# Altium PCB io_expansion.PcbDoc
Units mil, origin at the board's own origin, x right, y up, seen from the top; angles counter-clockwise.
Board outline 1000 x 1020 mil, 4 copper layers (Top Layer, GND, Signal Layer 2, Bottom Layer), stack 30.634 mil thick; 24 components, 32 nets, 127 pads, 43 vias.
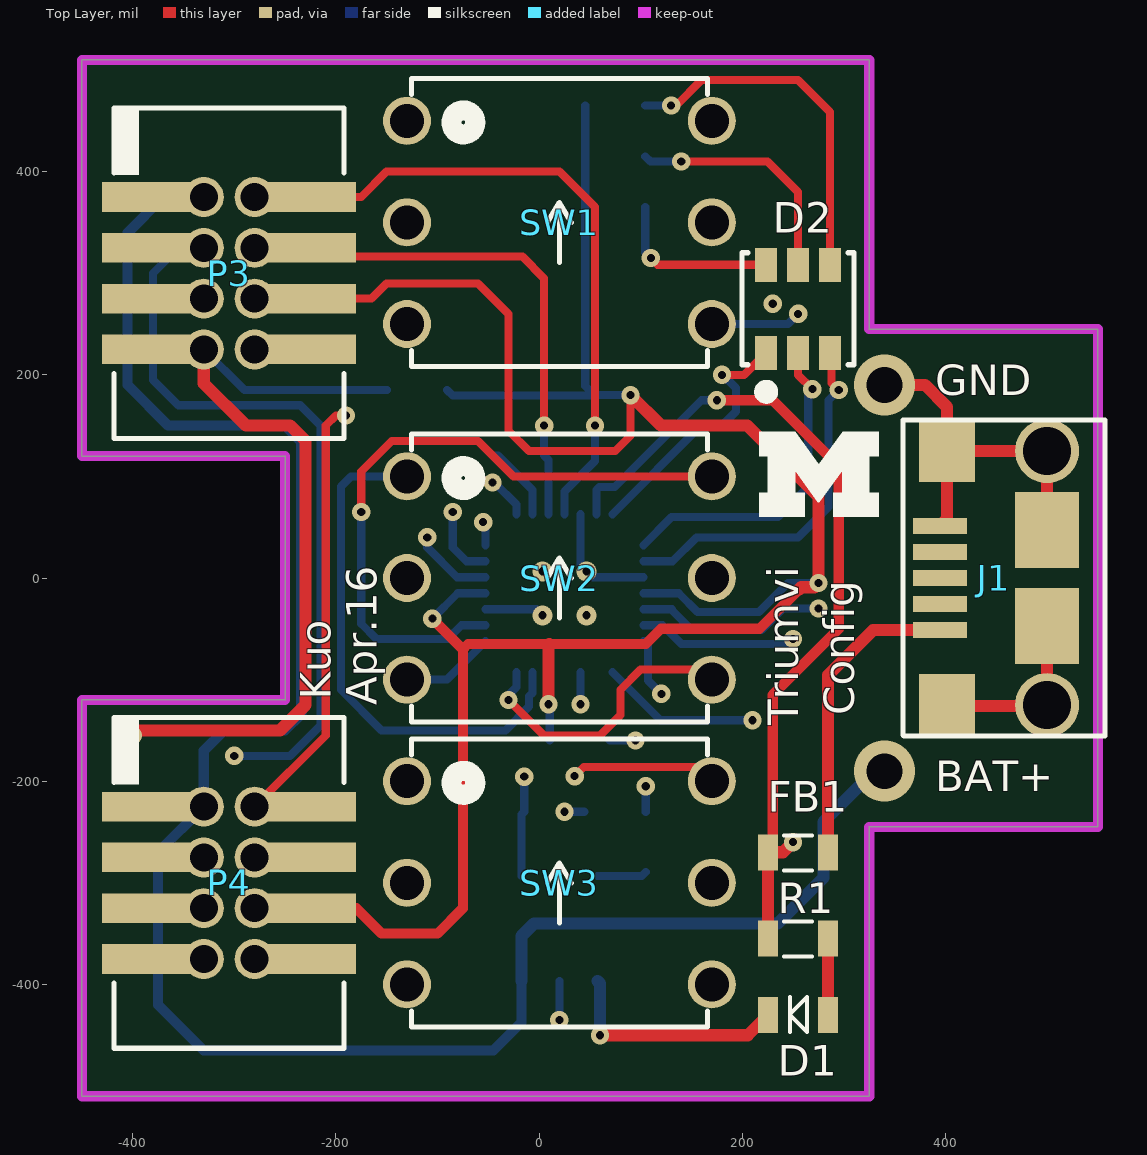
[diagram p0: Top Layer view]
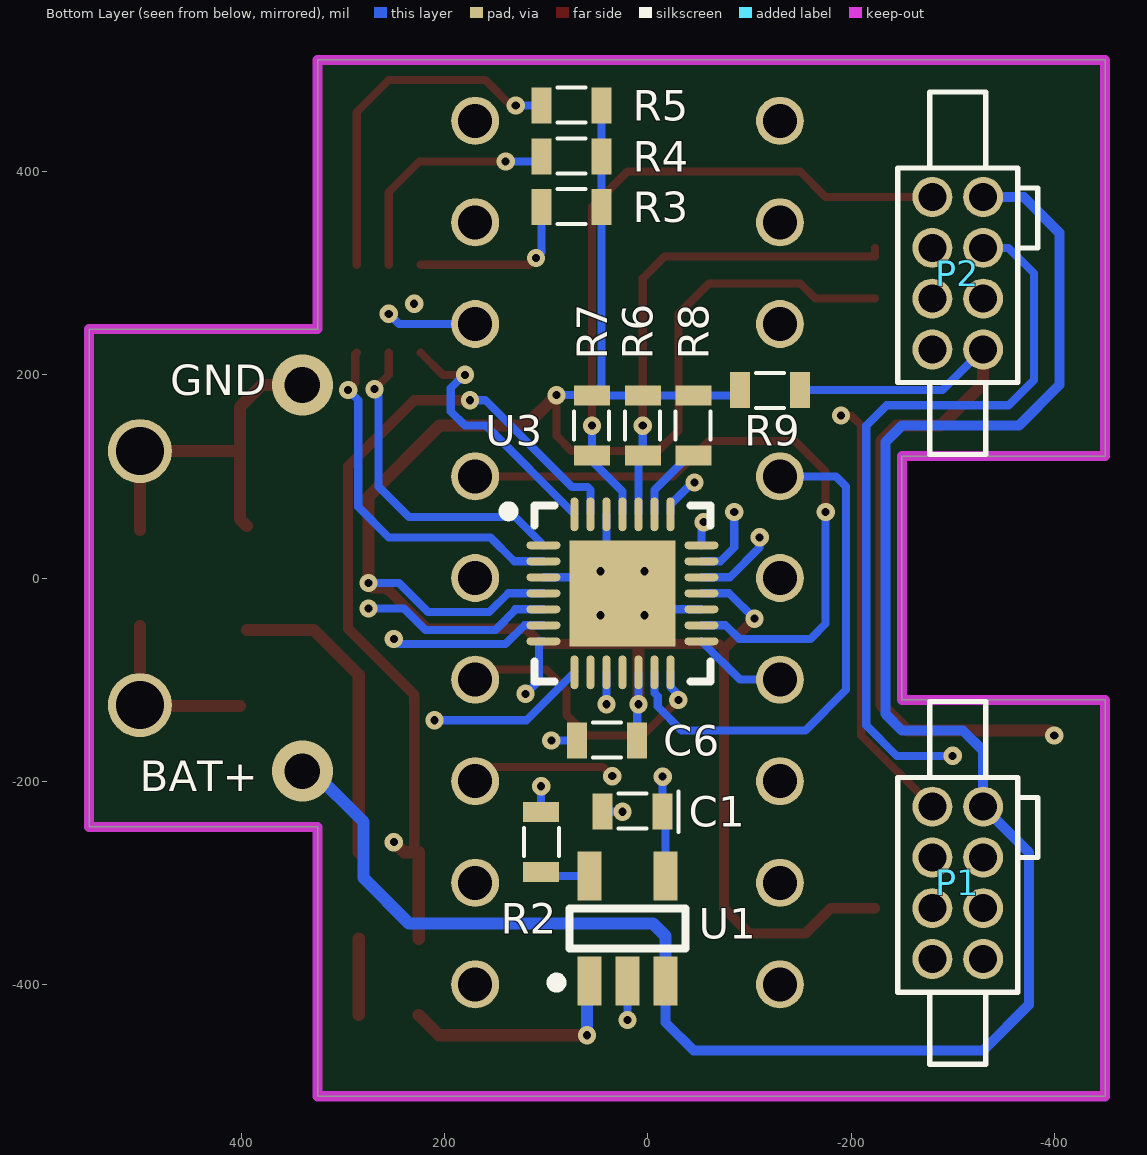
[diagram p1: Bottom Layer view, seen from below]
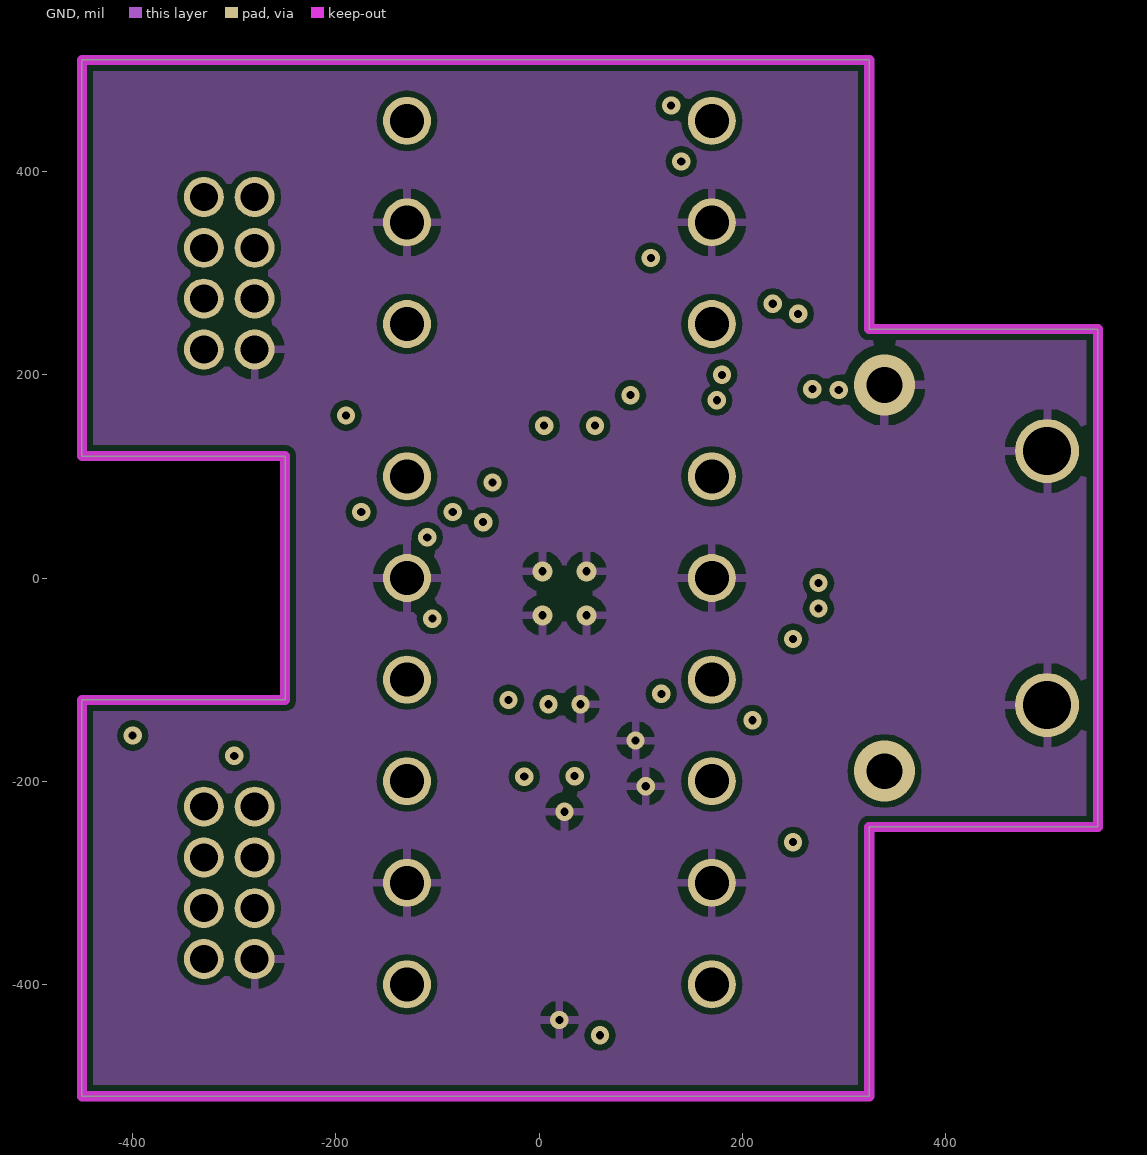
[diagram p2: GND]
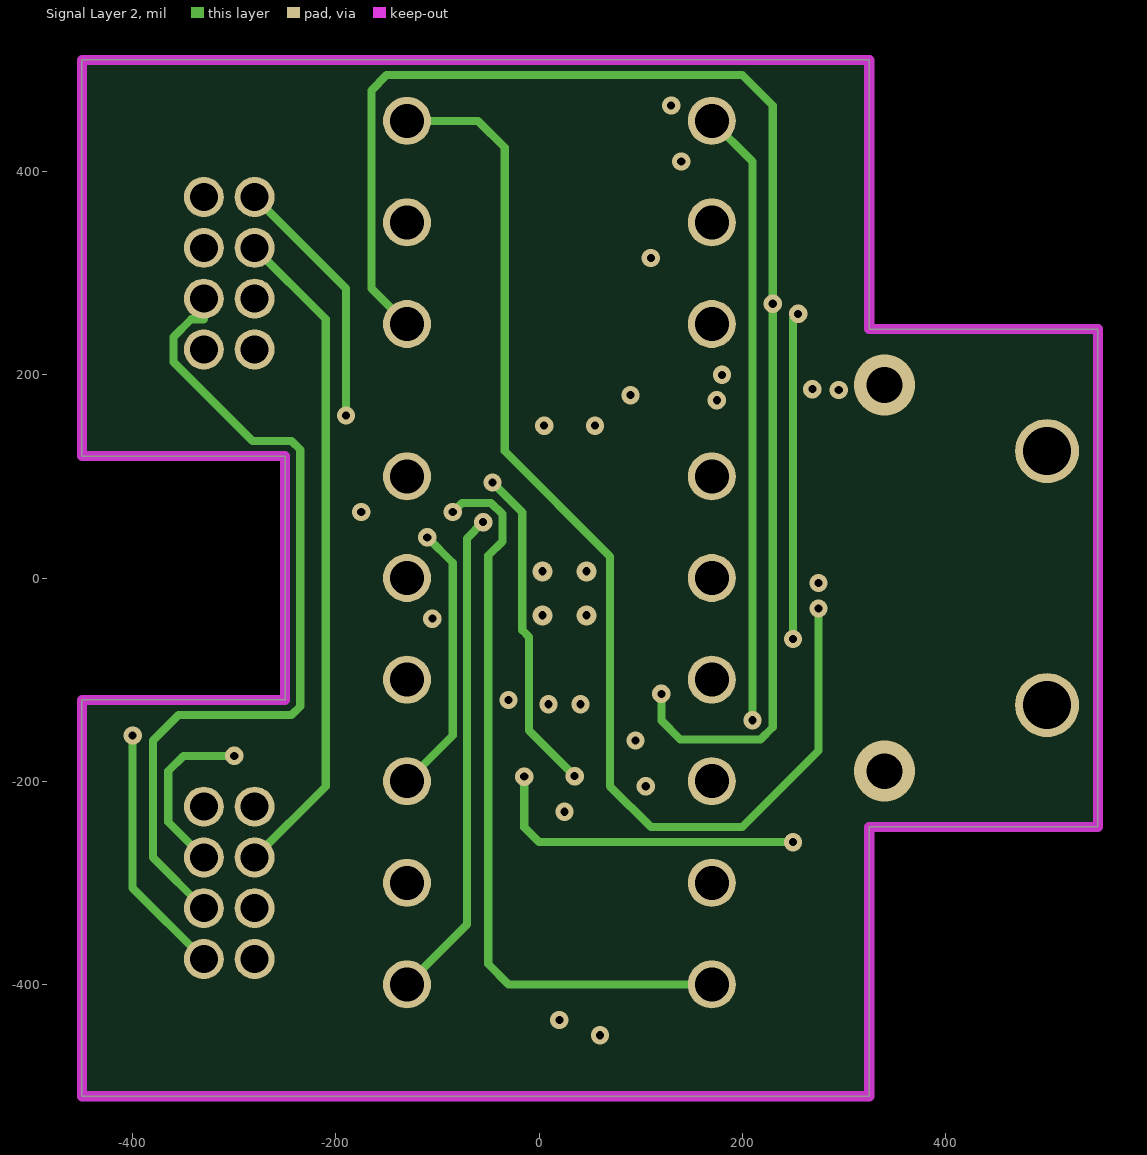
[diagram p3: Signal Layer 2]

## Layer stack, top to bottom
Top Solder: solder mask 0.4, Solder Resist, Dk 3.5
Top Layer: signal copper 1.4
Dielectric 1: core 10, FR-4, Dk 4.2
GND: signal copper 1.417
Dielectric 3: prepreg 5, Dk 4.2
Signal Layer 2: signal copper 1.417
Dielectric 2: core 10, Dk 4.2
Bottom Layer: signal copper 1.4
Bottom Solder: solder mask 0.4, Solder Resist, Dk 3.5

## Board outline
-450,-510 -450,-120 -250,-120 -250,120 -450,120 -450,510 325,510 325,245 550,245 550,-245 325,-245 325,-510

## Design rules (kind name [scope] priority, off if disabled: settings)
Clearance "non plated holes" [InPadClass('NPHOLES')] p1: gap=10 // Sunstone Circuits Minimum Clearance Rule (MLB~4&6 Layer Designs)
Clearance "Clearance~Sunstone Circuits" [All] p2: gap=6 // Sunstone Circuits Minimum Clearance Rule (MLB~4&6 Layer Designs)
DiffPairsRouting [All] p1: maxlimit=10 minlimit=10 mostfreqgap=10 toplayer_minwidth=6 toplayer_maxwidth=15 toplayer_prefwidth=15 midlayer1_minwidth=6 midlayer1_maxwidth=15 midlayer1_prefwidth=15 midlayer2_minwidth=6 midlayer2_maxwidth=15 midlayer2_prefwidth=15 bottomlayer_minwidth=6 bottomlayer_maxwidth=15 bottomlayer_prefwidth=15 maxuncoupledlength=500
HoleSize "HoleSize~Sunstone Circuits" [All] p1: absolutevalues=TRUE maxlimit=251 minlimit=8 maxpercent=80.000 minpercent=20.000 // Sunstone Circuits Hole Size Rule (MLB~4&6 Layer Designs)
HoleSize Testpoint [All] p2: absolutevalues=TRUE maxlimit=100 minlimit=1 maxpercent=80.000 minpercent=20.000
HoleSize TestPointUsage [All] p3: absolutevalues=TRUE maxlimit=100 minlimit=1 maxpercent=80.000 minpercent=20.000
MinimumAnnularRing "MinimumAnnularRing~Sunstone Circuits" [All] p1 off: minimumring=7 // Sunstone Circuits Minimum Annular Ring (MLB~4&6 Layer Designs)
MinimumSolderMaskSliver [All] p1 off: minsoldermaskwidth=10
PlaneClearance "PlaneClearance~Sunstone Circuits" [All] p1: clearance=12 // Sunstone Circuits Power Plane Clearance Rule (MLB~4&6 Layer Designs)
PlaneConnect "PlaneConnect~Sunstone Circuits" [All] p1: planeconnectstyle=Relief reliefexpansion=10 reliefentries=4 reliefconductorwidth=8 reliefairgap=10 // Sunstone Circuits Power Plane Connect Rule (MLB~4&6 Layer Designs)
PolygonConnect "PolygonConnect~Sunstone Circuits" [All] p1: connectstyle=Relief reliefconductorwidth=8 reliefentries=4 polygonreliefangle="90 Angle" airgapwidth=10 // Sunstone Circuits Polygon Connect Style (MLB~4&6 Layer Designs)
RoomDefinition io_expansion [InComponentClass('io_expansion')] p1 off: confinementstyle=ConfineIn formatcopy=TRUE lockcomponents=FALSE outline -443,-475.3 -443,475.3 -400,475.3 -400,491.04 -166.62,491.04 -166.62,504.24 206.62,504.24 206.62,341.93 322.62,341.93 322.62,171.42 610,171.42 610,-171.42 311.26,-171.42 311.26,-464.61 -167,-464.61 -167,-475.3 -233.44,-475.3 -233.44,-491.04 -400,-491.04 -400,-475.3
RoutingVias "RoutingVias~Sunstone Circuits" [All] p1: holewidth=16 width=30 viastyle="Through Hole" minholewidth=6 minwidth=18 maxholewidth=20 maxwidth=40 // Sunstone Circuits Routing Vias Rule (MLB~4&6 Layer Designs)
ShortCircuit "ShortCircuit~Sunstone Circuits" [All] p1: allowed=FALSE // Sunstone Circuits Short Circuit Rule~Do Not Allow (MLB~4&6 Layer Designs)
SilkToSilkClearance [All] p1 off: silktosilkclearance=10
SilkToSolderMaskClearance [IsPad] p1 off: minsilkscreentomaskgap=10 clearancetoexposedcopper=TRUE
SolderMaskExpansion TentVias [isVia] p1: expansion=-20 // Sunstone Circuits Solder Mask Expansion Rule (MLB~4&6 Layer Designs)
SolderMaskExpansion "SolderMaskExpansion~Sunstone Circuits" [All] p2: expansion=3 // Sunstone Circuits Solder Mask Expansion Rule (MLB~4&6 Layer Designs)
ViasUnderSMD "ViasUnderSMD~Sunstone Circuits" [All] p1: allowed=FALSE // Sunstone Circuits Vias Under SMD~Do Not Allow (MLB~4&6 Layer Designs)
Width "Width~Sunstone Circuits" [All] p1: maxlimit=100 minlimit=6 preferedwidth=10 // Sunstone Circuits Minimum Width Rule (MLB~4&6 Layer Designs)
22 further rules are at their usual default settings.

## Components (designator, comment, footprint, x,y, rotation, side; value= is the part's Value field where it differs from the comment)
C1 "Tantalum capacitor" "0603 - Polar Marking" 15,-230 r0 bottom
C6 "Ceramic capacitor" 0603 40,-160 r0 bottom
D1 "LED, Green" "0603 - DIODE" 255,-430 r180 top
D2 "CLY6D-FKC" PLCC6 255,265 r90 top
FB1 "Ferrite Bead" 0603 255,-270 r0 top
J1 "micro USB-B" "Micro USB-B" 500,0 r90 top
P1 "SFM-104-01-L-D" SFM-104-01-L-D -305,-300 r270 bottom locked
P2 "SFM-104-01-L-D" SFM-104-01-L-D -305,300 r270 bottom locked
P3 "TFM-104-02-L-D" TFM-104-02-L-D -305,300 r270 top
P4 "TFM-104-02-L-D" TFM-104-02-L-D -305,-300 r270 top
R1 "Chip resistor" 0603 255,-355 r0 top
R2 "Chip resistor" 0603 105,-260 r90 bottom
R3 "Chip resistor" 0603 75,365 r0 bottom
R4 "Chip resistor" 0603 75,415 r0 bottom
R5 "Chip resistor" 0603 75,465 r0 bottom
R6 "Chip resistor" 0603 5,150 r270 bottom
R7 "Chip resistor" 0603 55,150 r270 bottom
R8 "Chip resistor" 0603 -45,150 r270 bottom
R9 "Chip resistor" 0603 -120,185 r180 bottom
SW1 "SH-7050MC" SH-7000C 20,350 r0 top
SW2 "SH-7010MC" SH-7000C 20,0 r0 top
SW3 "SH-7010MC" SH-7000C 20,-300 r0 top
U1 "LTC4054L-4.2" TSOT23-5 20,-345 r90 bottom
U3 "SX1509B" QFN40P400X400X60_HS-29N 25,-15 r180 bottom

## Footprints (in the part's own frame and the unit in brackets; to place one, negate y for a bottom-side part, rotate by r counter-clockwise, add the part's x,y. Pads: shape width x height; smd on the part's side, far side on the other; paste and mask are expansions set on the pad)
0603 [mm] "2-Leads, Body 1.55x0.85mm, IPC Medium Density"
  rect 0.5x0.9 smd: 1(-0.75,0) 2(0.75,0)
  silkscreen extent -0.35,-0.45 0.35,0.43, body extent -0.75,-0.42 0.75,0.43, height 0.5
"0603 - DIODE" [mm] "2-Leads, Body 1.55x0.85mm, IPC Medium Density"
  rect 0.5x0.9 smd: 1(-0.75,0) 2(0.75,0)
  silkscreen extent -0.23,-0.45 0.2,0.43, body extent -0.75,-0.42 0.75,0.43, height 0.5
"0603 - Polar Marking" [mm] "2-Leads, Body 1.55x0.85mm, IPC Medium Density"
  rect 0.5x0.9 smd: 1(-0.75,0) 2(0.75,0)
  silkscreen extent -1.14,-0.51 0.35,0.51, body extent -0.75,-0.42 0.75,0.43, height 0.5
"Micro USB-B" [mm]
  rect 0.4x1.35 smd mask+0.1: 1(-1.3,2.675) 2(-0.65,2.675) 3(0,2.675) 4(0.65,2.675) 5(1.3,2.675)
  rect 1.6x1.4 smd mask+0.1: 6(-3.2,2.5) 6(3.2,2.5)
  round 1.6 hole 1.2: 6(-3.175,0) 6(3.175,0)
  rect 1.9x1.6 smd mask+0.1: 6(-1.2,0) 6(1.2,0)
  silkscreen extent -3.95,-1.45 3.95,3.6, body extent -4.1,-2.54 4.1,2.89, height 2.68
PLCC6 [mm] "CREE PLCC6 LED"
  rect 0.85x0.55 smd: 1(-1.1,0.8) 2(-1.1,0) 3(-1.1,-0.8) 4(1.1,-0.8) 5(1.1,0) 6(1.1,0.8)
  silkscreen extent -2.22,-1.4 1.4,1.4, body extent -1.7,-1.4 1.7,1.4, height 1.85
QFN40P400X400X60_HS-29N [mm] "QFN, 28-Leads, Body 4.00x4.00mm, Pitch 0.40mm, Thermal Pad 2.65x2.65mm, IPC Medium Density"
  oval 0.85x0.2 smd: 1(-1.975,1.2) 2(-1.975,0.8) 3(-1.975,0.4) 4(-1.975,0) 5(-1.975,-0.4) 6(-1.975,-0.8) 7(-1.975,-1.2) 15(1.975,-1.2) 16(1.975,-0.8) 17(1.975,-0.4) 18(1.975,0) 19(1.975,0.4) 20(1.975,0.8) 21(1.975,1.2)
  oval 0.2x0.85 smd: 8(-1.2,-1.975) 9(-0.8,-1.975) 10(-0.4,-1.975) 11(0,-1.975) 12(0.4,-1.975) 13(0.8,-1.975) 14(1.2,-1.975) 22(1.2,1.975) 23(0.8,1.975) 24(0.4,1.975) 25(0,1.975) 26(-0.4,1.975) 27(-0.8,1.975) 28(-1.2,1.975)
  rect 2.65x2.65 smd: 29(0,0)
  silkscreen extent -2.98,-2.2 2.2,2.2, body extent -2.05,-2.05 2.05,2.05, height 0.6
SFM-104-01-L-D [mm] "Samtec throughhole tiger eye socket, 2 row 8 pos"
  round 1 hole 0.7: 1(-1.905,-0.635) 2(-0.635,-0.635) 3(0.635,-0.635) 4(1.905,-0.635) 5(1.905,0.635) 6(0.635,0.635) 7(-0.635,0.635) 8(-1.905,0.635)
  silkscreen extent -4.53,-1.5 4.53,2, body extent -4.52,-1.52 4.5,2.16, height 4.57
SH-7000C [mm]
  round 1.2 hole 0.85: 1(-3.81,2.54) 2(3.81,-2.54) 4(-3.81,-2.54) 8(3.81,2.54) C(-3.81,0) C(3.81,0)
  silkscreen extent -3.7,-3.6 3.7,3.6, body extent -3.7,-3.6 3.7,3.6, height 3.75
TFM-104-02-L-D [mm]
  rect 0.74x2.22 smd: 1(-1.905,-2.065) 2(-0.635,-2.065) 3(0.635,-2.065) 4(1.905,-2.065) 5(1.905,2.065) 6(0.635,2.065) 7(-0.635,2.065) 8(-1.905,2.065)
  silkscreen extent -4.14,-2.88 4.14,2.88, body extent -4.13,-2.98 4.13,2.98, height 5.59
TSOT23-5 [mm] "SOT23, 5-Leads, Body 2.90x2.80mm, Pitch 0.95mm, IPC Medium Density"
  rect 1.22x0.6 smd: 1(-1.31,0.95) 2(-1.31,0) 3(-1.31,-0.95) 4(1.31,-0.95) 5(1.31,0.95)
  silkscreen extent -1.47,-1.45 0.5,1.9, body extent -0.87,-1.45 0.87,1.45, height 1

## Part data
C1: library part C_4.7u_10V_0603_tantalum, "Tantalum capacitor, 4.7 uF, 0603 package"
C6: library part C_0.1u_25V_0603_ceramic, "Ceramic capacitor, 0.1 uF, 0603 package"
D1: library part D_LED_GREEN_0603, "LED, Green,  0603"
D2: library part D_CLY6D-FKC, "CREE PLCC6 3 in 1 SMD LED"
FB1: library part FB_500mA_0603, "Ferrite Bead, 500 mA, 0603 package"
J1: library part "Micro USB", "CONN USB MICRO B RECPT SMT R/A"
P1 P2 P3 P4: "Samtec 50 mil, 8 pos, double row"
R1 R5: library part R_330_0603, "Chip resistor, 330, 0603 package"
R2: library part R_1.5K_0603_1%, "Chip resistor, 1.5 K, 0603 package"
R3: library part R_150_0603, "Chip resistor, 150,  0603 package"
R4: library part R_220_0603, "Chip resistor, 220, 0603 package"
R6 R7 R9: library part R_20K_0603, "Chip resistor, 20K, 0603 package"
R8: library part R_100K_0603, "Chip resistor, 100K, 0603 package"
SW1 SW2 SW3: "ROTARY CODED SWITCHES"
U1: "150 mA Standalone Linear Li-Ion Battery Charger in ThinSOT"
U3: "Voltage Level Shifting GPIO  with LED Driver and Keypad Engine"

## Via types
v1: diameter 18, hole 8, Top Layer to Bottom Layer, 37 vias
v2: diameter 19.68, hole 8, Top Layer to Bottom Layer, 4 vias
v3: diameter 60, hole 35, Top Layer to Bottom Layer, 2 vias

## Nets (pads, with @x,y where several pads share a name; then routed paths per layer and width w, separated by ;. In a path a pad name is that pad's centre, name@x,y a point inside that pad or via, vN(x,y) a via of type N, cw(c..) or ccw(c..) an arc to the next point about the centre after c; other vN are vias at no path point)
GND: C1.2 C6.2 J1.5 J1.6 P1.4 P2.4 P3.5 P4.5 R2.2 SW1.C SW2.C SW3.C U1.2 U3.3 U3.10 U3.17 U3.26 U3.29 | length 859.8
  Top Layer w12: v3(340,190) 380,190 401.57,168.43 J1.6@401.57,125.98 ; J1.5 401.57,58.07 J1.6@401.57,125.98 ; J1.6@401.57,-125.98 499.02,-125.98 500,-125 J1.6@500,-47.24 ; J1.6@500,47.24 500,125 402.56,125 J1.6@401.57,125.98
  Bottom Layer w8: U3.17 -2.56,-30.75 v2(3.35,-36.65) ; v1(20,-435) U1.2 ; v1(25,-230) C1.2 ; v1(40.75,-124.25) U3.10 ; U3.26 40.75,12.56 v2(46.65,6.65) 52.56,0.75 U3.3 ; C6.2 v1(95,-160) ; R2.2 v1(105,-205)
  other v2: 46.65,-36.65 3.35,6.65
I2C_SCL: P1.1 P2.1 P3.8 P4.8 R7.2 U3.25 | length 1354.9
  Top Layer w8: P1.1 -210,-155 -210,150 -200,160 v1(-190,160) ; P2.1 P3.8 -175,375 -150,400 20,400 55,365 v1(55,150)
  Signal Layer 2 w8: P2.1 -190,285 v1(-190,160)
  Bottom Layer w8: U3.25 25,85 55,115 R7.2 v1(55,150)
I2C_SDA: P1.2 P2.2 P3.7 P4.7 R6.2 U3.24 | length 1138.2
  Top Layer w8: P3.7 -223.7,316.38 -16.38,316.38 5,295 v1(5,150)
  Signal Layer 2 w8: P1.2 -210,-205 -210,255 P2.2
  Bottom Layer w8: v1(5,150) R6.2 9.25,116.22 U3.24
NetD1_1: D1.1 R1.2 | length 75
  Top Layer w12: D1.1 R1.2
NetD1_2: D1.2 U1.1 | length 228.3
  Top Layer w12: v1(60,-450) 205.47,-450 D1.2
  Bottom Layer w12: U1.1 60,-399.17 v1(60,-450)
NetD2_1: D2.1 U3.28 | length 258.5
  Top Layer w8: v1(180,200) 201.81,200 D2.1
  Bottom Layer w8: U3.28 159.49,150 180,150 194,164 194,186.87 180.87,200 v1(180,200)
NetD2_2: D2.2 U3.1 | length 325.4
  Top Layer w8: D2.2 255,199.87 v1(269,185.87)
  Bottom Layer w8: U3.1 130.51,60 235,60 265,90 265,181.87 v1(269,185.87) v1@269.13,185.87
NetD2_3: D2.3 U3.2 | length 363.8
  Top Layer w8: D2.3 288,220.19 288,192 v1(295,185)
  Bottom Layer w8: U3.2 131.5,16.5 155,40 255,40 285,70 285,175 v1(295,185)
NetD2_4: D2.4 R5.2 | length 355.6
  Top Layer w8: v1(130,465) 135,465 160,490 255,490 286.5,458.5 D2.4
  Bottom Layer w8: R5.2 v1(130,465)
NetD2_5: D2.5 R4.2 | length 236.7
  Top Layer w8: v1(140,410) 225,410 255,380 D2.5
  Bottom Layer w8: R4.2 109.53,410 v1(140,410)
NetD2_6: D2.6 R3.2 | length 168.5
  Top Layer w8: v1(110,315) 116.69,308.31 D2.6
  Bottom Layer w8: R3.2 104.53,320.47 v1(110,315)
NetP1_5: P1.5 P2.5 P3.4 P4.4 R9.2 | length 1045.4
  Top Layer w12: v1(-400,-155) -395,-150 -255,-150 -230,-125 -230,135 -245,150 -288.5,150 -330,191.5 P2.5
  Signal Layer 2 w8: v1(-400,-155) -400,-305 P1.5
  Bottom Layer w8: P2.5 -290,185 R9.2
NetP1_6: P1.6 P2.6 P3.3 P4.3 | length 839.4
  Signal Layer 2 w8: P1.6 -380,-275 -380,-160 -355,-135 -243.79,-135 -235,-126.21 -235,126.21 -243.79,135 -281.98,135 -359.69,212.7 -359.69,237.3 -342.3,254.69 -330,254.69 P2.6
NetP1_7: P1.7 P2.7 P3.2 P4.2 | length 912.1
  Signal Layer 2 w8: P1.7 -365,-240 -365,-190 -350,-175 v1(-300,-175)
  Bottom Layer w8: P2.7 -355,325 -380,300 -380,195 -355,170 -235,170 -215,150 -215,-145 -245,-175 v1(-300,-175)
NetR2_1: R2.1 U1.5 | length 49.2
  Bottom Layer w8: U1.5 101.1,-293.43 R2.1
NetR8_2: R8.2 U3.23 | length 76.3
  Bottom Layer w8: R8.2 -40.47,120.47 -6.5,86.5 U3.23
NetSW1_1: SW1.1 U3.5 | length 1361.4
  Signal Layer 2 w8: SW1.1 -60,450 -33.76,423.76 -33.76,125 70,21.24 70,-205 110,-245 200,-245 275,-170 v1(275,-30)
  Bottom Layer w8: U3.5 130.75,-30.75 130.75,-31.75 150,-51 219,-51 240,-30 v1(275,-30)
NetSW1_2: SW1.2 U3.6 | length 568.2
  Signal Layer 2 w8: v1(250,-60) 250,255 v1(255,260)
  Bottom Layer w8: U3.6 121.5,-46.5 140,-65 245,-65 v1(250,-60) ; SW1.2 245,250 v1(255,260)
NetSW1_4: SW1.4 U3.7 | length 1481.8
  Signal Layer 2 w8: SW1.4 -165,285 -165,480 -150,495 200,495 230,465 v1(230,270) 230,-146.87 217.87,-159 139,-159 120.36,-140.36 v1(120.36,-114)
  Bottom Layer w8: U3.7 107.24,-62.24 107.24,-100.89 v1(120.36,-114) v1@121.36,-115
NetSW1_8: SW1.8 U3.8 | length 763.9
  Signal Layer 2 w8: SW1.8 210,410 v1(210,-140)
  Bottom Layer w8: U3.8 119.49,-140 v1(210,-140)
NetSW2_1: SW2.1 U3.13 | length 515.9
  Bottom Layer w8: SW2.1 -185,100 -195,90 -195,-110 -155,-150 -33.13,-150 -9.75,-126.62 -9.75,-116.38 -6.5,-113.13 U3.13
NetSW2_2: SW2.2 U3.14 | length 290.7
  Top Layer w8: v1(-30,-120) 5,-155 60,-155 80,-135 80,-110 100,-90 160,-90 SW2.2
  Bottom Layer w8: v1(-30,-120) -30,-115 -22.24,-107.24 U3.14
NetSW2_4: SW2.4 U3.15 | length 92.9
  Bottom Layer w8: SW2.4 -90.51,-100 U3.15
NetSW2_8: SW2.8 U3.16 | length 656
  Top Layer w8: v1(-175,65) -175,105 -145,135 -60,135 -25,100 SW2.8
  Bottom Layer w8: v1(-175,65) -175,-45 -160,-60 -90,-60 -76.5,-46.5 U3.16
NetSW3_1: SW3.1 U3.19 | length 348.4
  Signal Layer 2 w8: SW3.1 -85,-155 -85,15 v1(-110,40)
  Bottom Layer w8: v1(-110,40) -110,30 -80.75,0.75 U3.19
NetSW3_2: SW3.2 U3.20 | length 807.1
  Signal Layer 2 w8: v1(-85,65) -76,74 -47.13,74 -36,62.87 -36,36 -50,22 -50,-380 -30,-400 SW3.2
  Bottom Layer w8: v1(-85,65) -85,30 -71.5,16.5 U3.20
NetSW3_4: SW3.4 U3.21 | length 509.8
  Signal Layer 2 w8: SW3.4 -71,-341 -71,39 v1(-55,55)
  Bottom Layer w8: v1(-55,55) -52.76,52.76 U3.21
NetSW3_8: SW3.8 U3.22 | length 509.3
  Top Layer w8: v1(35,-195) 44,-186 156,-186 SW3.8
  Signal Layer 2 w8: v1(-45.93,94.07) -16.5,64.63 -16.5,-51.37 -10,-57.86 -10,-150 v1(35,-195)
  Bottom Layer w8: v1(-45.93,94.07) -44.07,94.07 -22.24,72.24 U3.22
V_EXTERNAL: P1.8 P2.8 P3.1 P4.1 U1.3 | length 2000.8
  Bottom Layer w10: P2.8 -370,375 -405,340 -405,190 -365,150 -250,150 -234,134 -234,-134 -250,-150 -310,-150 -330,-170 P1.8 -375,-270 -375,-420 -330,-465 -45,-465 -17.4,-437.4 U1.3
  Bottom Layer w12: U1.3 -17.4,-352.4 -5,-340 235,-340 280,-295 280,-240 v3@330,-190
  other v3: 340,-190
V_USB: FB1.2 J1.1 | length 303
  Top Layer w12: FB1.2 284.53,-95.47 328.82,-51.18 J1.1
V_USB_F: C1.1 FB1.1 R1.1 U1.4 U3.27 | length 1268.1
  Top Layer w10: v1(175,175) 230,175 295,110 295,-50 230,-115 230,-265.47 FB1.1
  Top Layer w12: R1.1 FB1.1 240,-270 v1(250,-260)
  Signal Layer 2 w8: v1(-14.53,-195.47) -14.53,-245.47 0,-260 v1(250,-260)
  Bottom Layer w8: U1.4 -17.4,-232.87 C1.1 v1(-14.53,-195.47) ; U3.27 56.5,86.78 59.21,89.49 74.49,89.49 160,175 v1(175,175)
VCC3: C6.1 P1.3 P2.3 P3.6 P4.6 R3.1 R4.1 R5.1 R6.1 R7.1 R8.1 R9.1 U3.4 U3.12 U3.18 | length 2511.1
  Top Layer w8: P3.6 -165,275 -150,290 -60,290 -30,260 -30,145 -10,125 75,125 90,140 v1(90,180)
  Top Layer w10: P4.6 -180,-325 -155,-350 -100,-350 -75,-325 -75,-70 ; v1(-105,-40) -75,-70 ; 256,-11 217,-50 120,-50 105,-65 10,-65 -70,-65 -75,-70
  Top Layer w12: v1(9.25,-124.25) 9.25,-65.75 10,-65 ; v1(90,180) 120,150 205,150 275,80 v1(275,-5) 271,-9 258,-9 256,-11
  Bottom Layer w8: v1(-105,-40) -80,-15 U3.18 ; R9.1 -85,179.53 R8.1 R6.1 R7.1 ; U3.12 v1(9.25,-124.25) 10.47,-125.47 C6.1 ; R5.1 R4.1 R3.1 45.47,189.06 R7.1 ; v1(90,180) 55.47,180 R7.1 ; U3.4 137.45,-15 156.07,-33.62 216.38,-33.62 245,-5 v1(275,-5)
pads on no net: J1.2 J1.3 J1.4 U3.9 U3.11

## Polygon pours and split planes (outlines as drawn)
GND on GND "Top Layer-No Net" (solid, pour order 0): -450,-510 -450,-120 -250,-120 -250,120 -450,120 -450,510 325,510 325,245 550,245 550,-245 325,-245 325,-510

## Keep-outs
Keep-Out Layer:
  the board outline again, w10

## Silkscreen, mask and mechanical layers (free items; w line width, h text height)
Top Overlay:
  region: 216.61,60.12 261.33,60.12 261.33,84 252.23,84 252.23,105.6 274.4,74.52 275.92,74.52 298.47,105.6 298.47,84 289.37,84 289.37,60.12 334.1,60.12 334.1,84 325,84 325,120 334.1,120 334.1,143.88 298.66,143.88 275.92,112.42 274.78,112.42 252.04,143.88 216.61,143.88 216.61,120 225.32,120 225.32,84 216.61,84
  text "GND" at 390,180 h30
  text "Kuo" at -205,-120 h30 r90
  text "Apr.16" at -160,-125 h30 r90
  text "Config" at 310,-135 h30 r90
  text "Triumvi" at 255,-145 h30 r90
  text "BAT+" at 390,-210 h30
Bottom Overlay:
  text "GND" at 470,180 h30
  text "BAT+" at 500,-210 h30
Mechanical 14:
  lines w10: -500,-110 -260,-110 -260,110 -500,110 ; 335,-545 335,-255 585,-255 ; 335,545 335,255 585,255
Mechanical 16:
  lines w10: -550,-520 650,-520 ; -550,520 650,520 ; -460,-610 -460,610 ; 560,-610 560,610